# EAGLE board Coil (EAGLE 9.2.0)
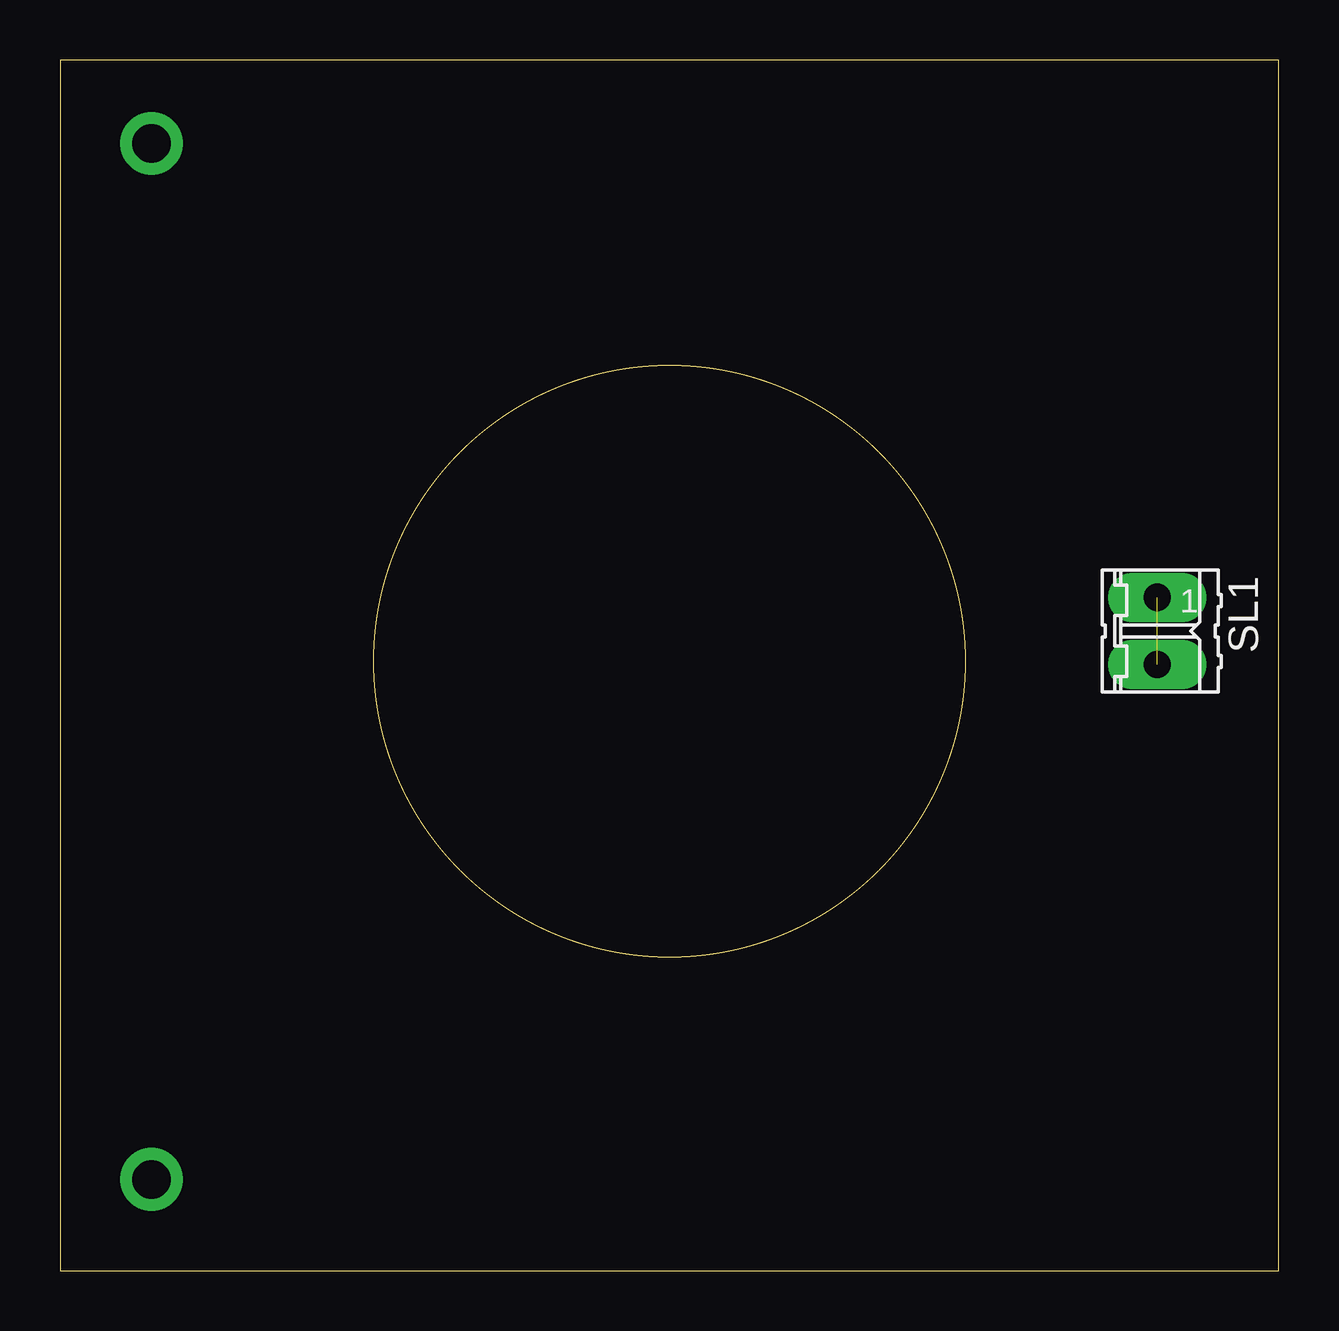
[diagram p0: board, top side]
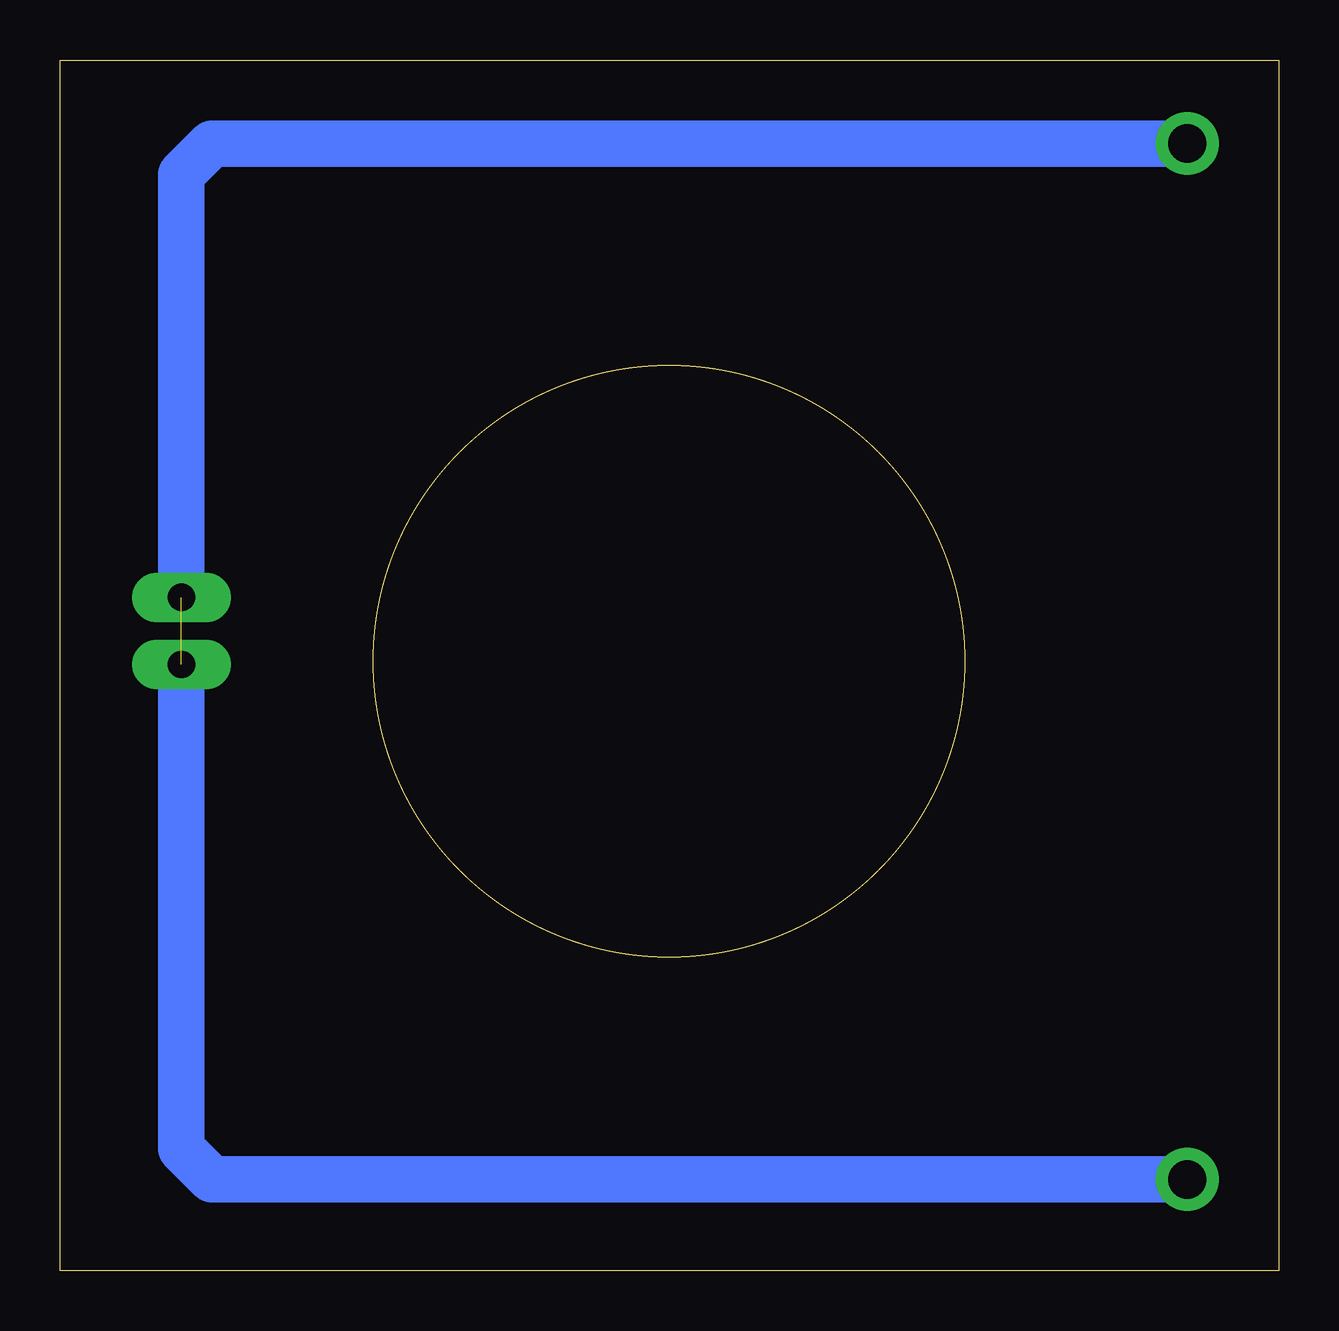
[diagram p1: board, bottom side, seen from below]

Size 50.78 x 50.47 mm. Coordinates in mm from the lower left corner, seen from the top.
Outline: 0,0 50.78,0 50.78,50.47 0,50.47 0,0
Outline: circle at 25.4,25.4 radius 12.33
Copper layers (1*16): Top 0.035mm / dielectric 1.5mm / Bottom 0.035mm
Design rules "default *": minimum track width 10mil, minimum drill 24mil, track to track 16mil, track to pad 16mil, pad to pad 16mil, via to via 16mil, smd to smd 8mil, copper to edge 40mil, drill to drill 8mil, minimum pad ring 16mil, minimum via ring 16mil, stop-mask expansion 4mil, vias tented up to drill 0mil, thermal gap 10mil

## Footprints (pad centres in the part's own frame; a part is rotated, then mirrored left to right if it is on the bottom)
02P = drill 1.143 long: 1 -1.397,0; 2 1.397,0

## Placement (x,y rotation side)
SL1  [02P]  45.72,26.67 270 top

## Library data of the parts
SL1 = CEDT_JANUARY_2015_v5

## Nets
N$3: SL1.1 SL1.2

## Tracks (layer width: path | path; a pad name or v marks a point on that pad's centre or on a via)
N$3  (via drill 1.6 pad 2.54)  (1 unrouted)
  Bottom 1.93: SL1.1 45.72,45.72 44.45,46.99 v3.81,46.99 | SL1.2 45.72,5.08 44.45,3.81 v3.81,3.81